# Altium PCB PCB1.PcbDoc
Units mm, origin at the board's own origin, x right, y up, seen from the top; angles counter-clockwise.
Board outline 140.08 x 111.12 mm, 2 copper layers (Top Layer, Bottom Layer); 49 components, 36 nets, 142 pads, 4 vias.
Unrouted connection lines stored in the file: 4.
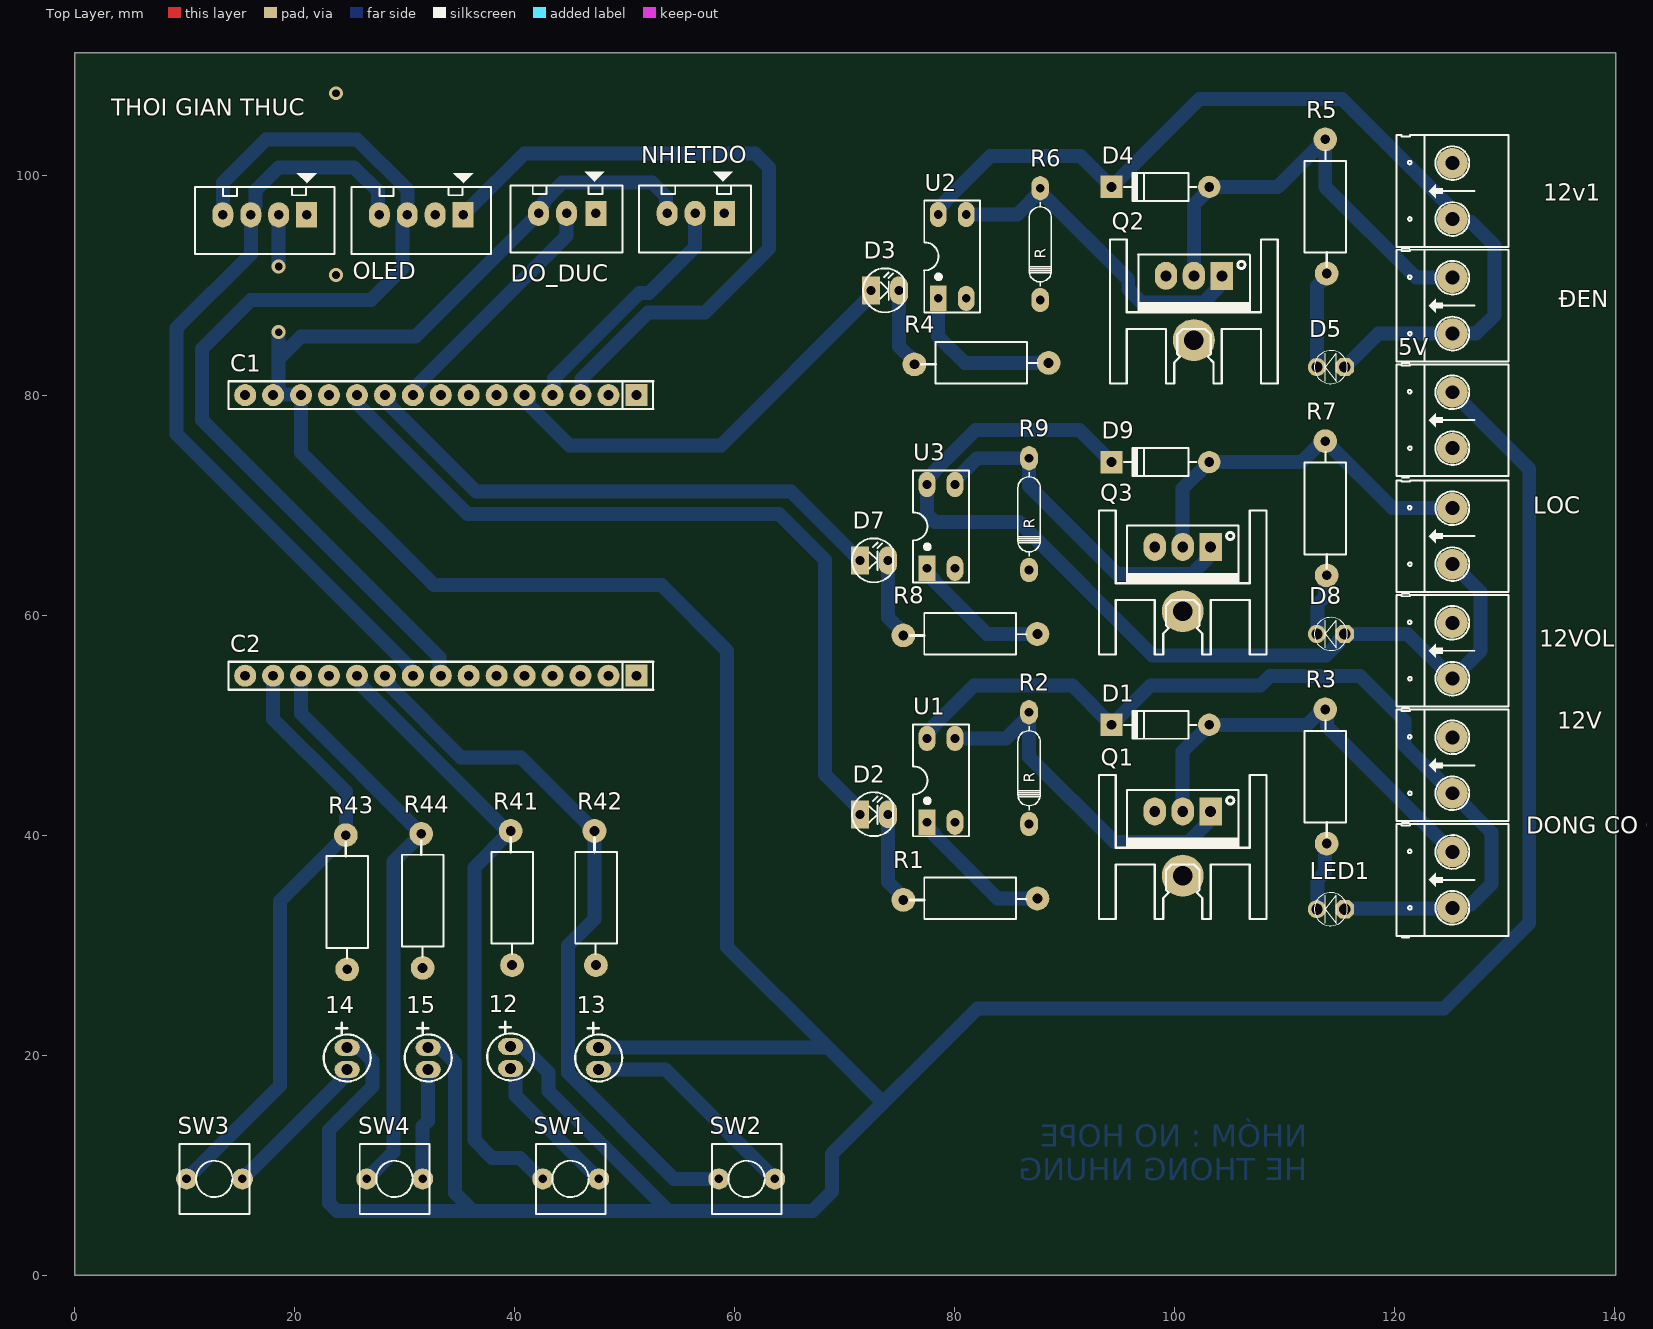
[diagram p0: Top Layer view]
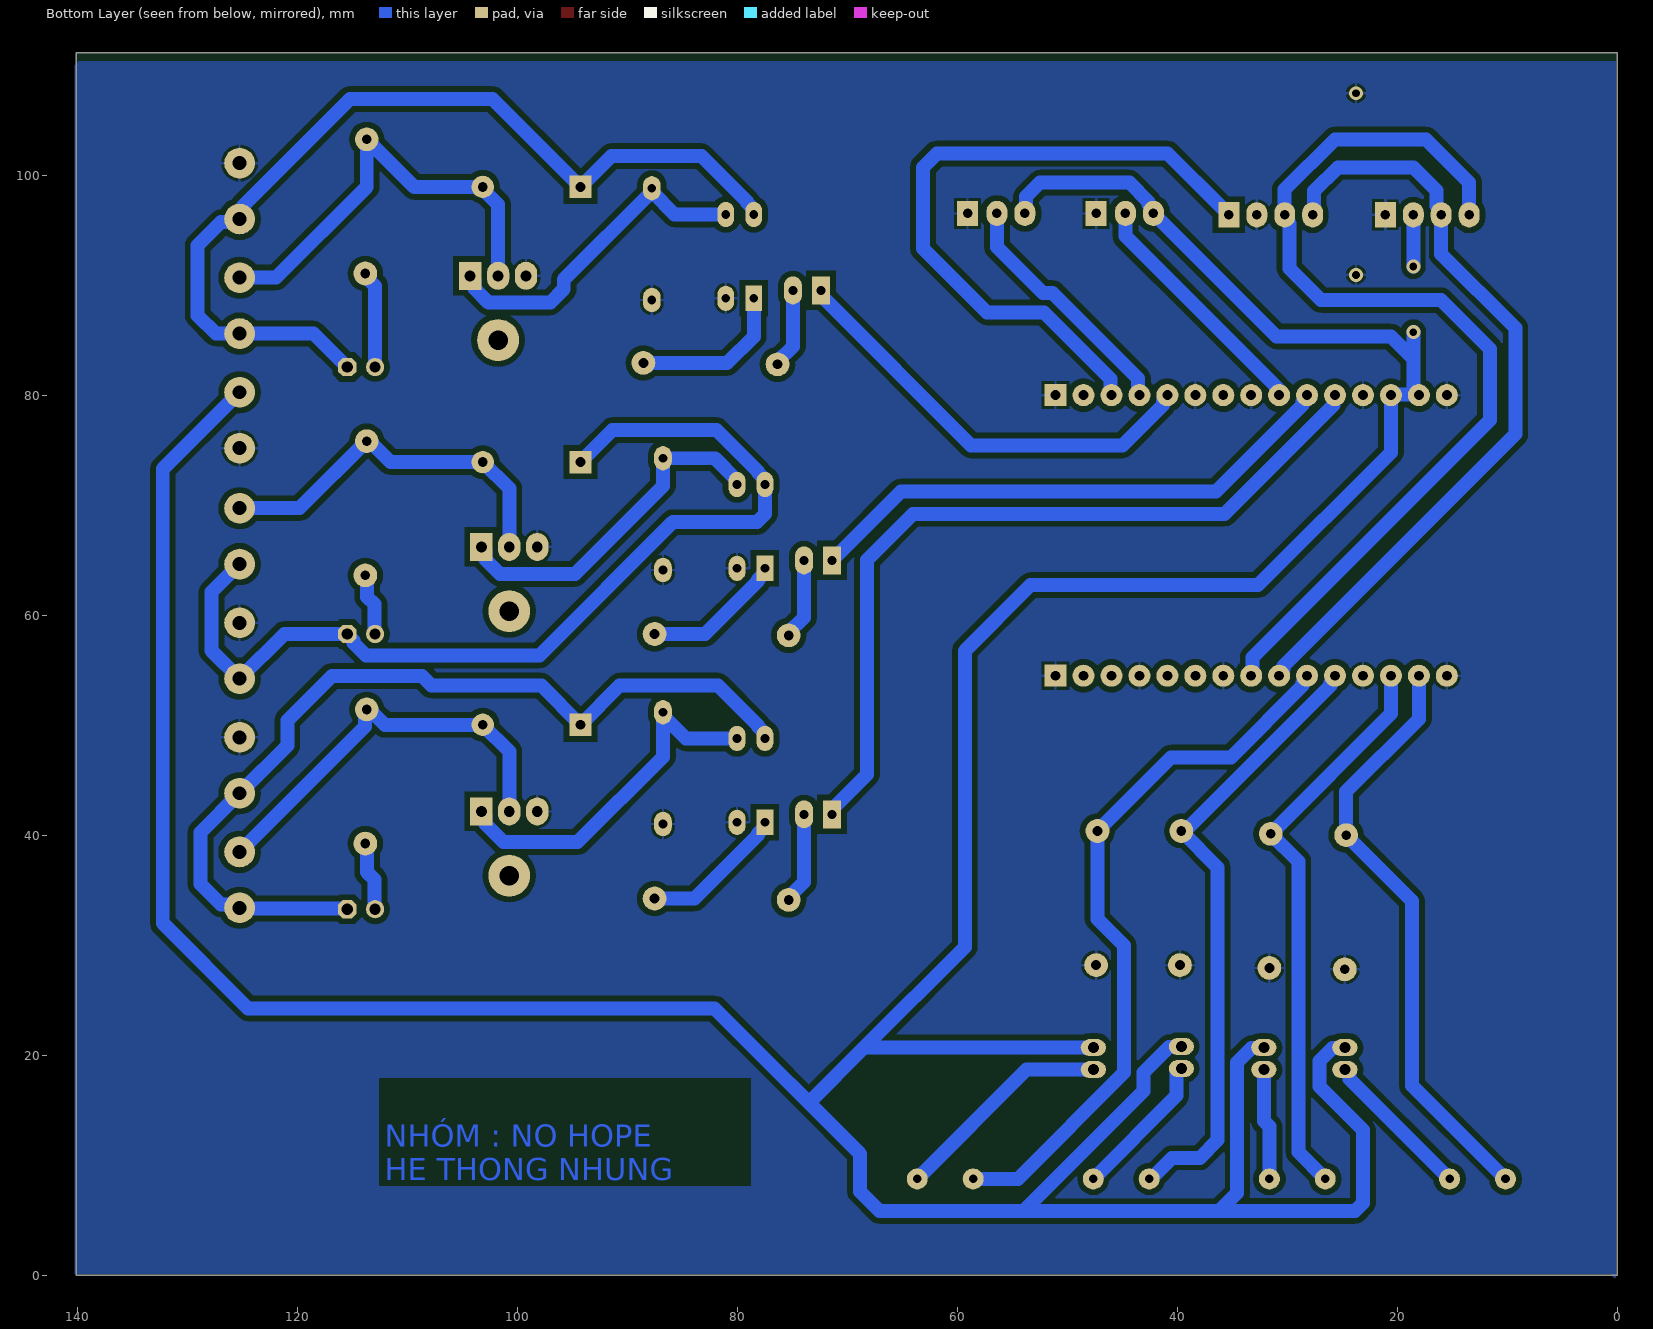
[diagram p1: Bottom Layer view, seen from below]
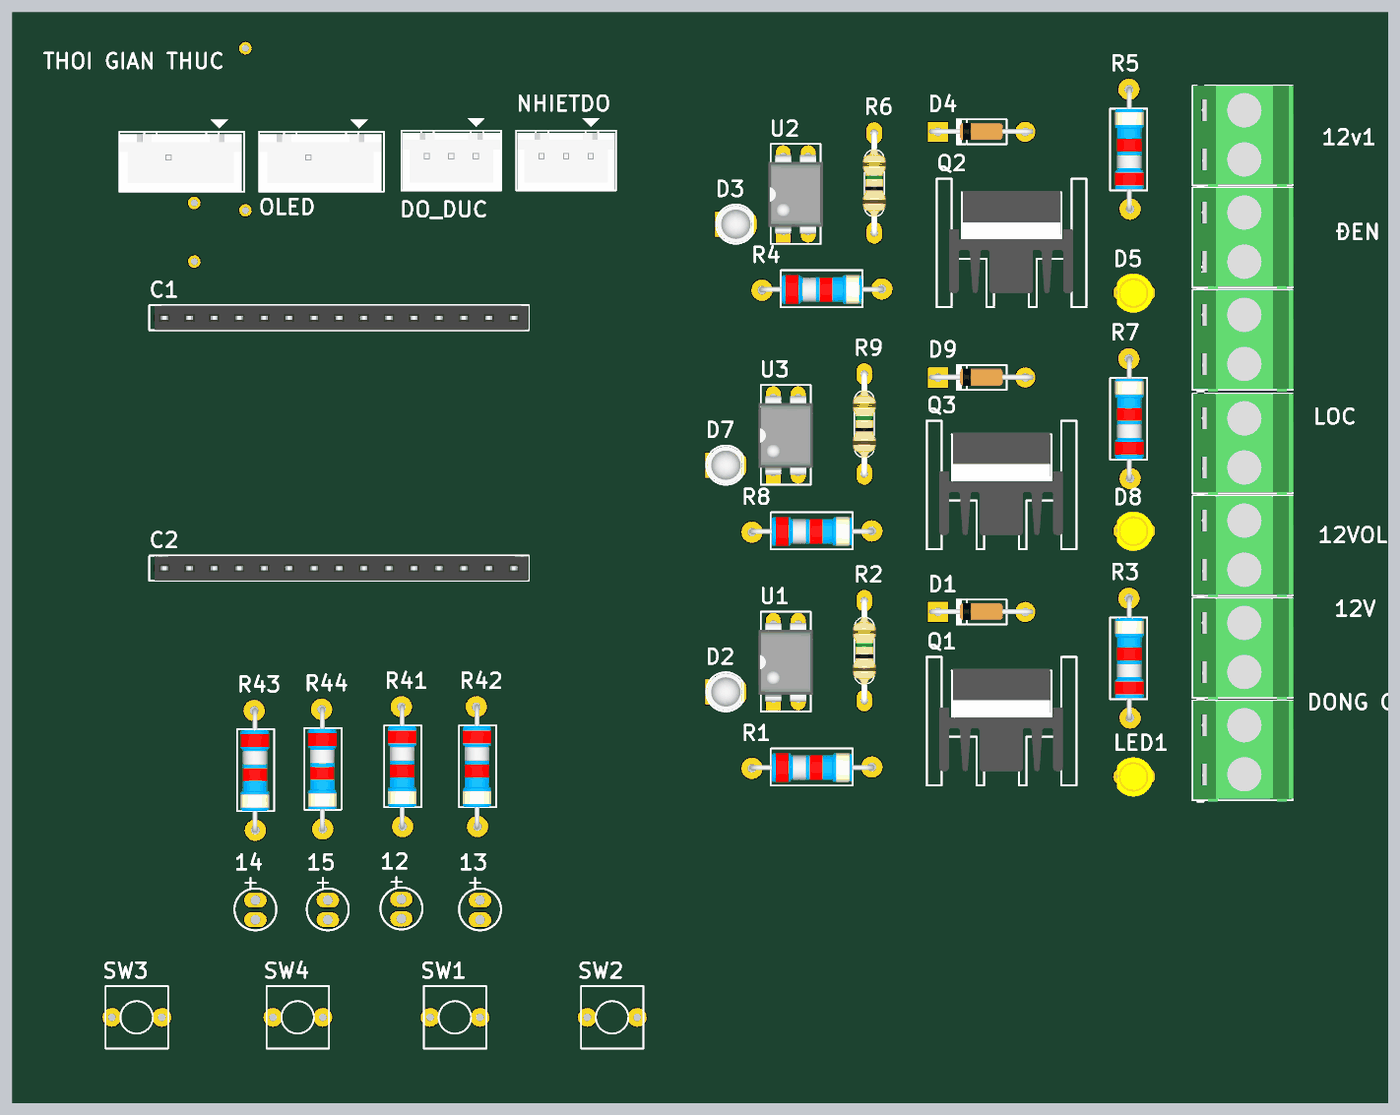
[diagram p2: 3D render of the assembled board from above, using the file's embedded part models]

## Layer stack, top to bottom
Top Solder: solder mask 0.0102, Solder Resist, Dk 3.5
Top Layer: signal copper 0.0356
Dielectric 1: dielectric 0.32, FR-4, Dk 4.8
Bottom Layer: signal copper 0.0356
Bottom Solder: solder mask 0.0102, Solder Resist, Dk 3.5

## Board outline
0,0 140.081,0 140.081,111.125 0,111.125

## Design rules (kind name [scope] priority, off if disabled: settings)
Clearance [All] p1: gap=0.508 ignorepadtopadclearanceinfootprint=FALSE
PolygonConnect [All] p1: connectstyle=Relief reliefconductorwidth=0.254 reliefentries=4 polygonreliefangle="90 Angle" airgapwidth=0.254
RoutingLayers [All] p1: top layer_v5=FALSE bottom layer_v5=TRUE
RoutingVias [All] p1: holewidth=0.711 width=1.27 viastyle="Through Hole" minholewidth=0.711 minwidth=1.27 maxholewidth=0.711 maxwidth=1.27
SolderMaskExpansion [All] p1: expansion=0.102 istentingtop=FALSE
Width [All] p1: maxlimit=1.27 minlimit=1.27 preferedwidth=1.27
29 further rules are at their usual default settings.

## Components (designator, comment, footprint, x,y, rotation, side; value= is the part's Value field where it differs from the comment)
5V "Header 2_1" HED2 125.222,75.184 r90 top value="Header 2"
12 "LED12" CAP10UF 39.624,18.796 r90 top
12V "Header 2_1" HED2 125.222,43.815 r90 top value="Header 2"
12v1 "Header 2_1" HED2 125.222,96.012 r90 top value="Header 2"
12VOL "Header 2_1" HED2 125.222,54.229 r90 top value="Header 2"
13 "LED13" CAP10UF 47.625,18.701 r90 top
14 "LED13" CAP10UF 24.765,18.701 r90 top
15 "LED14" CAP10UF 32.131,18.701 r90 top
C1 "JP15" JP15-C1T 51.054,80 r180 top
C2 "JP15" JP15-C1T 51.054,54.5 r180 top
D1 "1N4007" D1A 103.124,50.038 r0 top
D2 "LED" LED-3 71.374,41.9 r0 top value="LED 3 ly Single Colour"
D3 "LED" LED-3 72.39,89.525 r0 top value="LED 3 ly Single Colour"
D4 "1N4007" D1A 103.124,98.933 r0 top
D5 "LED" LED-3MM-YELLOW 115.443,82.55 r180 top value="LED 3 ly Single Colour"
D7 "LED" LED-3 71.374,64.983 r0 top value="LED 3 ly Single Colour"
D8 "LED" LED-3MM-YELLOW 115.443,58.293 r180 top value="LED 3 ly Single Colour"
D9 "1N4007" D1A 103.124,73.914 r0 top
DO_DUC "Header3" Header3 47.244,96.52 r180 top
"DONG CO CHO AN" "Header 2_1" HED2 125.222,33.401 r90 top value="Header 2"
LED1 "LED" LED-3MM-YELLOW 115.443,33.274 r180 top value="LED 3 ly Single Colour"
LOC "Header 2_1" HED2 125.222,64.643 r90 top value="Header 2"
NHIETDO "Header3" Header3 58.928,96.52 r180 top
OLED "Header4" Header4 35.306,96.393 r180 top
Q1 "IRF840" TO220H1 100.711,42.164 r180 top
Q2 "IRF840" TO220H1 101.727,90.848 r180 top
Q3 "IRF840" TO220H1 100.711,66.21 r180 top
R1 "200" RES-1/2W 80.899,34.247 r0 top
R2 "4k7" "DIEN TRO 1/4 W" 86.741,41.021 r90 top value="R1/4W - 1K"
R3 "Res" RES-1/2W 113.665,44.831 r90 top
R4 "200" RES-1/2W 81.915,82.931 r0 top
R5 "Res" RES-1/2W 113.665,96.647 r90 top
R6 "4k7" "DIEN TRO 1/4 W" 87.757,88.646 r90 top value="R1/4W - 1K"
R7 "Res" RES-1/2W 113.665,69.215 r90 top
R8 "200" RES-1/2W 80.899,58.293 r0 top
R9 "4k7" "DIEN TRO 1/4 W" 86.741,64.105 r90 top value="R1/4W - 1K"
R41 "Res" RES-1/2W 39.751,34.798 r270 top
R42 "Res" RES-1/2W 47.371,34.798 r270 top
R43 "Res" RES-1/2W 24.765,34.417 r270 top
R44 "Res" RES-1/2W 31.623,34.544 r270 top
SW1 "SW" SW2 42.545,8.763 r0 top value="SW chip 2 pin"
SW2 "SW" SW2 58.547,8.763 r0 top value="SW chip 2 pin"
SW3 "SW" SW2 10.16,8.763 r0 top value="SW chip 2 pin"
SW4 "SW" SW2 26.543,8.763 r0 top value="SW chip 2 pin"
"THOI GIAN THUC" "Header4" Header4 21.082,96.393 r180 top
U1 "PC817" DIP4 77.47,41.178 r0 top
U2 "PC817" DIP4 78.486,88.803 r0 top
U3 "PC817" DIP4 77.47,64.262 r0 top
ĐEN "Header 2_1" HED2 125.222,85.598 r90 top value="Header 2"

## Footprints (in the part's own frame and the unit in brackets; to place one, negate y for a bottom-side part, rotate by r counter-clockwise, add the part's x,y. Pads: shape width x height; smd on the part's side, far side on the other; paste and mask are expansions set on the pad)
CAP10UF [mil]
  oval 60x90 hole 39.37 unplated: 1(78.74,0) 2(0,0)
  silkscreen extent -42,-84 167,84
D1A [mil] "Diode 1A, W 100mil, L 350mil"
  round 80 hole 35: 1(0,0)
  rect 80x80 hole 35: 2(-350,0)
  silkscreen extent -305,-50 -45,50, body extent -386,-33 34,36, height 84
"DIEN TRO 1/4 W" [mm]
  oval 2.2x1.6 hole 0.787: 1(0,0) 2(10.16,0)
  silkscreen extent 1.26,-1.02 8.88,1.02, body extent -0.3,-1.16 10.46,1.16, height 2.93
DIP4 [mil]
  rect 60x90 hole 31: 1(0,0)
  oval 60x90 hole 31: 2(100,0) 3(100,300) 4(0,300)
  silkscreen extent -50,-50 150,350, body extent -59,-10 159,305, height 170
Header3 [mil] "CON 3"
  rect 75x90 hole 34: 1(-5,0)
  oval 75x90 hole 34: 2(100,0) 3(200,0)
  silkscreen extent -100,-150 300,140, body extent -95,-90 295,136, height 276
Header4 [mil] "CON4"
  rect 75x90 hole 34: 1(0,0)
  oval 75x90 hole 34: 2(100,0) 3(200,0) 4(300,0)
  silkscreen extent -100,-150 400,140, body extent -90,-90 398,136, height 276
HED2 [mil] "Header 2, 2 pin, hight 300mil, Pin to Pin 200, Colour Green"
  round 110 hole 50: 1(0,0) 2(200,0)
  silkscreen extent -106,-201 300,200, body extent -106,-205 300,197, height 560
JP15-C1T [mm] "15 row, straight, gold plating"
  rect 2x2 hole 0.9: 1(0,0)
  round 2 hole 0.9: 2(2.54,0) 3(5.08,0) 4(7.62,0) 5(10.16,0) 6(12.7,0) 7(15.24,0) 8(17.78,0) 9(20.32,0) 10(22.86,0) 11(25.4,0) 12(27.94,0) 13(30.48,0) 14(33.02,0) 15(35.56,0)
  silkscreen extent -1.52,-1.27 37.08,1.27, body extent -1.52,-1.25 36.58,1.25, height 8.51
LED-3 [mil] "LED 2 PIN, 3ly Only colour"
  rect 65x100 hole 32: 1(0,0)
  oval 65x100 hole 32: 2(100,0)
  silkscreen extent -29,-78 118,79, body extent -25,-75 113,75, height 217
LED-3MM-YELLOW [mil]
  oct 65x65 hole 40: 1(0,0)
  round 65 hole 40: 2(100,0)
  silkscreen extent -9,-59 109,59, body extent -27,-77 117,80, height 181
RES-1/2W [mil]
  round 85 hole 35: 1(-220,-5) 2(260,0)
  silkscreen extent -195,-74 221,75, body extent -230,-60 270,56, height 121
SW2 [mil] "SW button 2pin, 250x 250 mil"
  round 75 hole 31: 1(0,0) 2(200,0)
  silkscreen extent -25,-125 225,125
TO220H1 [mil] "TO-220 - 1-2-3"
  round 150 hole 70: 0(0,230)
  rect 80x100 hole 39: 1(-100,0)
  oval 80x100 hole 39: 2(0,0) 3(100,0)
  silkscreen extent -300,-130 300,385, body extent -246,-82 250,329, height 1000

## Part data
5V 12V 12v1 12VOL "DONG CO CHO AN" LOC ĐEN: "Header, 2-Pin", Manufacturer="Generic Components", Class=Connector
12 13 14 15: library part LED
C1 C2: "WR-PHD 2.54 mm Angled Socket Header", Manufacturer="W¨¹rth Elektronik eiSos GmbH", partNo=613015143121, ComponentLink1 Description=Manufacturer, ComponentLink1URL=http://www.we-online.com, ComponentLink2 Description=Datasheet, ComponentLink2URL=http://katalog.we-online.de/em/datasheet/6130xx143121.pdf, Created by="Karrer Zheng", Created Date="29 March 2013", NoPins=15
D1 D4 D9: library part D1A, "Diode 1A"
D2 D3 D5 D7 D8 LED1: "LED Single colour Green and Red"
DO_DUC NHIETDO: "Header IDC, 3 x 1 Pin Vertical 2.54mm Pitch (Non-Boxed, Male)", Manufacturer="W¨¹rth Elektronik eiSos GmbH", partNo=613002143121, ComponentLink1 Description=Manufacturer, ComponentLink1URL=http://www.we-online.com, ComponentLink2 Description=Datasheet, ComponentLink2URL=http://katalog.we-online.de/em/datasheet/6130xx143121.pdf, Created by="Karrer Zheng", Created Date="29 March 2013", NoPins=02
OLED "THOI GIAN THUC": "Header IDC, 4 x 1 Pin Vertical 2.54mm Pitch (Non-Boxed, Male)", Manufacturer="W¨¹rth Elektronik eiSos GmbH", partNo=613002143121, ComponentLink1 Description=Manufacturer, ComponentLink1URL=http://www.we-online.com, ComponentLink2 Description=Datasheet, ComponentLink2URL=http://katalog.we-online.de/em/datasheet/6130xx143121.pdf, Created by="Karrer Zheng", Created Date="29 March 2013", NoPins=02
Q1 Q2 Q3: "MOSFET N - CHANNEL 500V - 0.75 - 8A - TO-220"
R1 R4 R8: library part Res, "Res", Manufacturer="Generic Components", Class=Passive, Published=08/06/2000, Publisher="Altium Hobart Technology Centre", SubClass=R
R2 R6 R9: library part Res, "Resistor 1/4W"
R3 R5 R7 R41 R42 R43 R44: Manufacturer="Generic Components", Class=Passive, Published=08/06/2000, Publisher="Altium Hobart Technology Centre", SubClass=R
SW1 SW2 SW3 SW4: library part SW2, "Switch button 2 pin"
U1 U2 U3: "Single Opto"

## Via types
v1: diameter 1.27, hole 0.711, Top Layer to Bottom Layer, 4 vias

## Nets (pads, with @x,y where several pads share a name; then routed paths per layer and width w, separated by ;. In a path a pad name is that pad's centre, name@x,y a point inside that pad or via, vN(x,y) a via of type N, cw(c..) or ccw(c..) an arc to the next point about the centre after c; other vN are vias at no path point)
GND: 5V.1 12v1.2 12V.2 12VOL.2 "THOI GIAN THUC.1" C1.1 C1.6 C1.8 C1.12 C1.15 C2.1 C2.4 C2.7 C2.12 C2.15 DO_DUC.1 NHIETDO.1 OLED.2 Q1.3 Q2.3 Q3.3 R2.1 R6.1 R9.1 R41.2 R42.2 R43.2 R44.2 U1.2 U2.2 U3.2
  other v1: 23.749,90.932 23.749,107.442
Net5V_2: 5V.2 12.1 13.1 14.1 15.1 "THOI GIAN THUC.2" C1.13 C1.14 DO_DUC.3 NHIETDO.3 | length 405
  Bottom Layer w1.27: C1.14 18.103,80.069 20.505,80.069 C1.13 20.574,74.803 32.639,62.738 53.34,62.738 59.309,56.769 59.309,29.845 68.453,20.701 ; C1.14@18.542,80.707 v1(18.542,85.725) ; v1(18.542,91.694) 18.542,96.393 ; 18.669,83.439 20.574,85.344 30.988,85.344 41.852,96.208 41.871,96.208 42.164,96.501 DO_DUC.3 42.164,96.882 42.608,97.327 42.608,97.578 44.344,99.314 52.451,99.314 53.726,98.039 53.726,96.642 NHIETDO.3 ; 14.1 24.814,20.652 25.889,20.652 27.051,19.49 27.051,17.145 23.114,13.208 23.114,6.586 23.858,5.842 36.195,5.842 ; 15.1 32.18,20.652 33.255,20.652 34.544,19.363 34.544,7.493 36.195,5.842 ; 12.1 39.673,20.747 40.748,20.747 43.053,18.442 43.053,16.764 53.975,5.842 ; 13.1 68.453,20.701 ; 5V.2 132.207,73.279 132.207,32.004 124.46,24.257 82.042,24.257 77.008,19.223 73.469,15.684 ; 36.195,5.842 53.975,5.842 ; 53.975,5.842 67.056,5.842 68.834,7.62 68.834,11.049 73.469,15.684 ; 68.453,20.701 73.469,15.684
Net12_2: 12.2 SW1.2 | length 13.5
  Bottom Layer w1.27: 12.2 39.936,18.796 40.054,18.679 40.054,16.334 SW1.2
Net12v1_1: 12v1.1 D4.2 D5.1 U2.4 ĐEN.1 | length 85
  Bottom Layer w1.27: U2.4 78.486,96.873 79.121,97.508 79.121,97.593 83.255,101.727 91.44,101.727 D4.2 102.235,106.934 115.189,106.934 124.93,97.193 12v1.1@124.93,96.304 ; D5.1 118.491,85.598 127.381,85.598 129.032,87.249 129.032,93.599 126.911,95.72 125.514,95.72 12v1.1
Net12V_1: 12V.1 "DONG CO CHO AN.1" D1.2 LED1.1 U1.4 | length 83.1
  Bottom Layer w1.27: U1.4 77.47,49.248 78.105,49.883 78.105,49.968 81.731,53.594 90.678,53.594 D1.2 97.79,53.594 107.759,53.594 108.648,54.483 116.84,54.483 120.885,50.438 120.885,48.152 12V.1 128.778,40.259 128.778,35.56 126.911,33.693 125.514,33.693 125.158,33.337 115.506,33.337 LED1.1
Net12VOL_1: 12VOL.1 D8.1 D9.2 LOC.1 U3.4 | length 91.3
  Bottom Layer w1.27: D9.2 91.313,76.835 81.888,76.835 78.105,73.052 78.105,72.967 77.47,72.332 U3.4 77.47,69.197 78.214,68.453 85.852,68.453 97.98,56.325 113.718,56.325 114.871,57.478 114.871,57.681 115.443,58.252 D8.1 121.158,58.293 12VOL.1 127.762,56.769 127.762,62.103 LOC.1
Net13_2: 13.2 SW2.2 | length 20.1
  Bottom Layer w1.27: 13.2 53.689,18.701 SW2.2
Net14_2: 14.2 SW3.2 | length 14.1
  Bottom Layer w1.27: SW3.2 24.335,17.858 24.335,18.584 24.453,18.701 14.2
Net15_2: 15.2 SW4.2 | length 10.1
  Bottom Layer w1.27: SW4.2 31.623,13.505 32.131,14.013 15.2
NetC1_2: C1.2 C1.3 OLED.1 | length 61.6
  Bottom Layer w1.27: OLED.1 35.306,96.584 35.623,96.901 35.814,96.901 40.894,101.981 61.849,101.981 63.119,100.711 63.119,93.345 57.296,87.522 52.089,87.522 46.055,81.488 46.055,80.081 C1.3
NetC1_4: C1.4 NHIETDO.2 | length 22.4
  Bottom Layer w1.27: C1.4 43.574,80.14 43.574,81.521 51.352,89.3 52.216,89.3 56.388,93.472 NHIETDO.2
NetC1_5: C1.5 D3.1 | length 39.8
  Bottom Layer w1.27: C1.5 40.894,79.802 41.291,79.405 41.291,79.112 44.965,75.438 58.748,75.438 72.39,89.08 D3.1
NetC1_9: C1.9 DO_DUC.2 | length 22.3
  Bottom Layer w1.27: C1.9 30.874,80.14 30.874,80.63 37.672,87.429 44.704,94.461 DO_DUC.2
NetC1_10: C1.10 D7.1 | length 49.7
  Bottom Layer w1.27: C1.10 28.194,79.802 28.591,79.405 28.591,79.112 36.456,71.247 65.11,71.247 D7.1
NetC1_11: C1.11 D2.1 | length 73.6
  Bottom Layer w1.27: C1.11 25.794,79.86 25.794,79.108 35.687,69.215 64.008,69.215 68.199,65.024 68.199,45.519 71.374,42.344 D2.1
NetC2_8: "THOI GIAN THUC.4" C2.8 OLED.3 | length 90.5
  Bottom Layer w1.27: 13.462,96.393 13.462,99.314 17.399,103.251 25.654,103.251 30.226,98.679 30.226,96.031 29.781,95.586 29.781,91.504 26.924,88.646 16.002,88.646 11.557,84.201 11.557,77.724 33.134,56.147 33.134,54.64 C2.8
NetC2_9: "THOI GIAN THUC.3" C2.9 OLED.4 | length 71.1
  Bottom Layer w1.27: OLED.4 27.564,96.515 27.564,98.547 25.4,100.711 18.542,100.711 16.447,98.615 16.447,97.2 16.002,96.755 16.002,92.837 9.271,86.106 9.271,76.454 29.082,56.643 30.337,55.388 30.337,55.095 30.734,54.698 C2.9
NetC2_10: C2.10 R42.1 SW2.1 | length 65.9
  Bottom Layer w1.27: C2.10 28.194,54.302 28.591,53.905 28.591,53.612 35.119,47.084 40.546,47.084 R42.1 47.244,32.392 44.831,29.979 44.831,18.42 54.488,8.763 SW2.1
NetC2_11: C2.11 R41.1 SW1.1 | length 57.2
  Bottom Layer w1.27: C2.11 25.654,54.302 26.051,53.905 26.051,53.612 39.107,40.556 39.454,40.556 R41.1 36.322,37.084 36.322,12.301 37.942,10.681 40.456,10.681 42.373,8.763 SW1.1
NetC2_13: C2.13 R44.1 SW4.1 | length 52.3
  Bottom Layer w1.27: C2.13 20.574,51.054 R44.1 28.995,37.631 28.995,11.215 SW4.1
NetC2_14: C2.14 R43.1 SW3.1 | length 54.5
  Bottom Layer w1.27: SW3.1 18.669,17.272 18.669,34.036 R43.1 24.638,43.972 18.034,50.576 C2.14
NetD1_1: "DONG CO CHO AN.2" D1.1 Q1.2 R3.2 | length 37.7
  Bottom Layer w1.27: Q1.2 100.711,47.625 D1.1 112.027,50.038 113.424,51.435 R3.2 113.807,51.293 113.807,49.896 125.222,38.481
NetD2_2: D2.2 R1.1 | length 8.4
  Bottom Layer w1.27: D2.2 73.914,35.758 75.311,34.361 R1.1
NetD3_2: D3.2 R4.1 | length 7.3
  Bottom Layer w1.27: D3.2 74.93,84.442 76.327,83.045 R4.1
NetD4_1: D4.1 Q2.2 R5.2 ĐEN.2 | length 40.3
  Bottom Layer w1.27: Q2.2 101.727,97.33 103.124,98.727 D4.1 109.347,98.933 R5.2 113.665,98.933 121.92,90.678 ĐEN.2
NetD5_2: D5.2 R5.1 | length 8.9
  Bottom Layer w1.27: D5.2 112.903,89.929 113.792,90.818 R5.1
NetD7_2: D7.2 R8.1 | length 7.4
  Bottom Layer w1.27: D7.2 73.914,59.804 75.311,58.407 R8.1
NetD8_2: D8.2 R7.1 | length 5.7
  Bottom Layer w1.27: D8.2 112.976,58.366 112.976,61.009 113.622,61.655 113.622,63.457 R7.1
NetD9_1: D9.1 LOC.2 Q3.2 R7.2 | length 34.1
  Bottom Layer w1.27: Q3.2 100.711,71.501 D9.1 111.519,73.914 113.424,75.819 R7.2 119.761,69.723 LOC.2
NetLED1_2: LED1.2 R3.1 | length 6.3
  Bottom Layer w1.27: LED1.2 112.976,33.347 112.976,35.99 113.622,36.636 113.622,39.073 R3.1
NetQ1_1: Q1.1 R2.2 U1.3 | length 33
  Bottom Layer w1.27: U1.3 84.658,48.798 R2.2@86.741,50.881 ; R2.2 R2.2@86.741,50.881 ; Q1.1 102.87,41.783 102.87,41.016 101.224,39.37 94.488,39.37 86.741,47.117 R2.2@86.741,50.881
NetQ2_1: Q2.1 R6.2 U2.3 | length 30.5
  Bottom Layer w1.27: U2.3 85.674,96.423 R6.2@87.757,98.506 ; R6.2 R6.2@87.757,98.506 ; Q2.1 103.886,90.467 103.886,89.7 102.621,88.435 96.967,88.435 95.758,89.644 95.758,90.505 R6.2@87.757,98.506
NetQ3_1: Q3.1 R9.2 U3.3 | length 31.7
  Bottom Layer w1.27: U3.3 80.01,72.263 82.012,74.265 R9.2 86.741,71.755 94.742,63.754 101.562,63.754 102.87,65.062 102.87,65.829 Q3.1
NetR1_2: R1.2 U1.1 | length 13.2
  Bottom Layer w1.27: U1.1 77.47,40.797 78.105,40.162 78.105,40.008 83.866,34.247 R1.2
NetR4_2: R4.2 U2.1 | length 14.5
  Bottom Layer w1.27: U2.1 78.486,85.344 80.899,82.931 R4.2
NetR8_2: R8.2 U3.1 | length 12.8
  Bottom Layer w1.27: U3.1 77.47,63.881 78.105,63.246 78.105,63.092 82.904,58.293 R8.2
pads on no net: C1.7 C2.2 C2.3 C2.5 C2.6 Q1.0 Q2.0 Q3.0

## Polygon pours and split planes (outlines as drawn)
GND on Bottom Layer "NONET_L01_P-001" (solid, remove dead copper, pour order 0): 0.127,110.363 139.827,110.363 140.208,109.982 140.208,0.127 0.635,0.127 0.127,-0.381

## Other copper
Bottom Layer:
  text "NHÓM : NO HOPE / HE THONG NHUNG" at 112.014,8.636 h2.03

## Text inside footprints (layer, text, board x,y; h text height)
R2: Top Overlay "R" at 87.262,44.767 h1 r90
R6: Top Overlay "R" at 88.278,92.392 h1 r90
R9: Top Overlay "R" at 87.262,67.851 h1 r90